# EAGLE board Android Wearable (EAGLE 5.11)
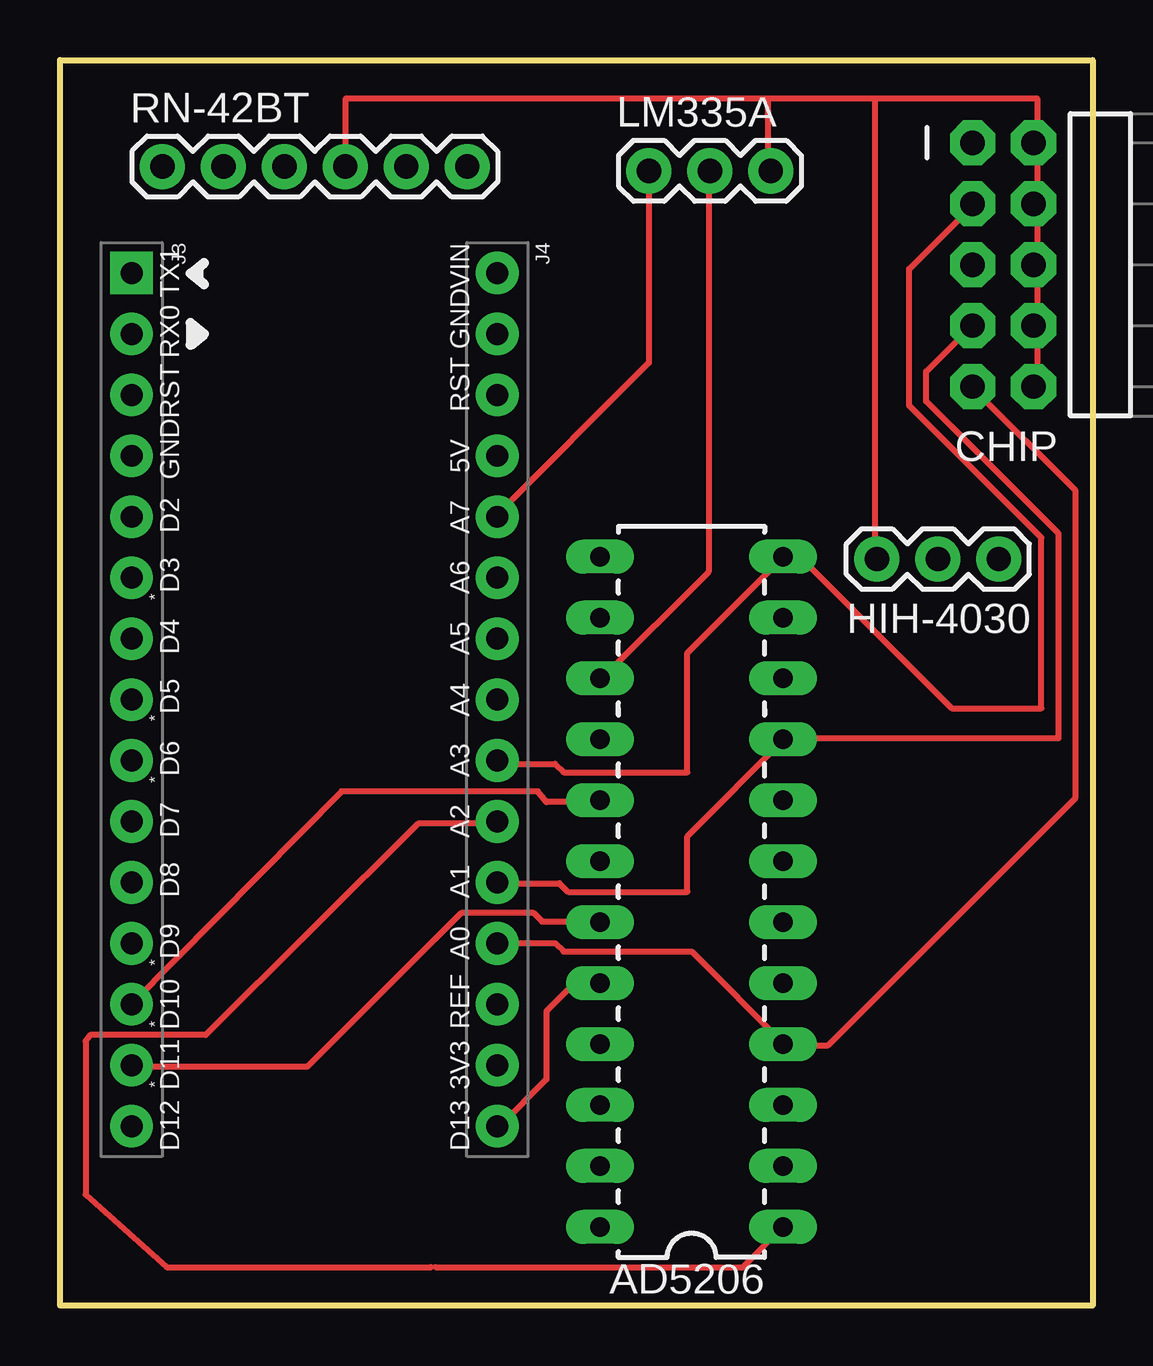
[diagram p0: board, top side]
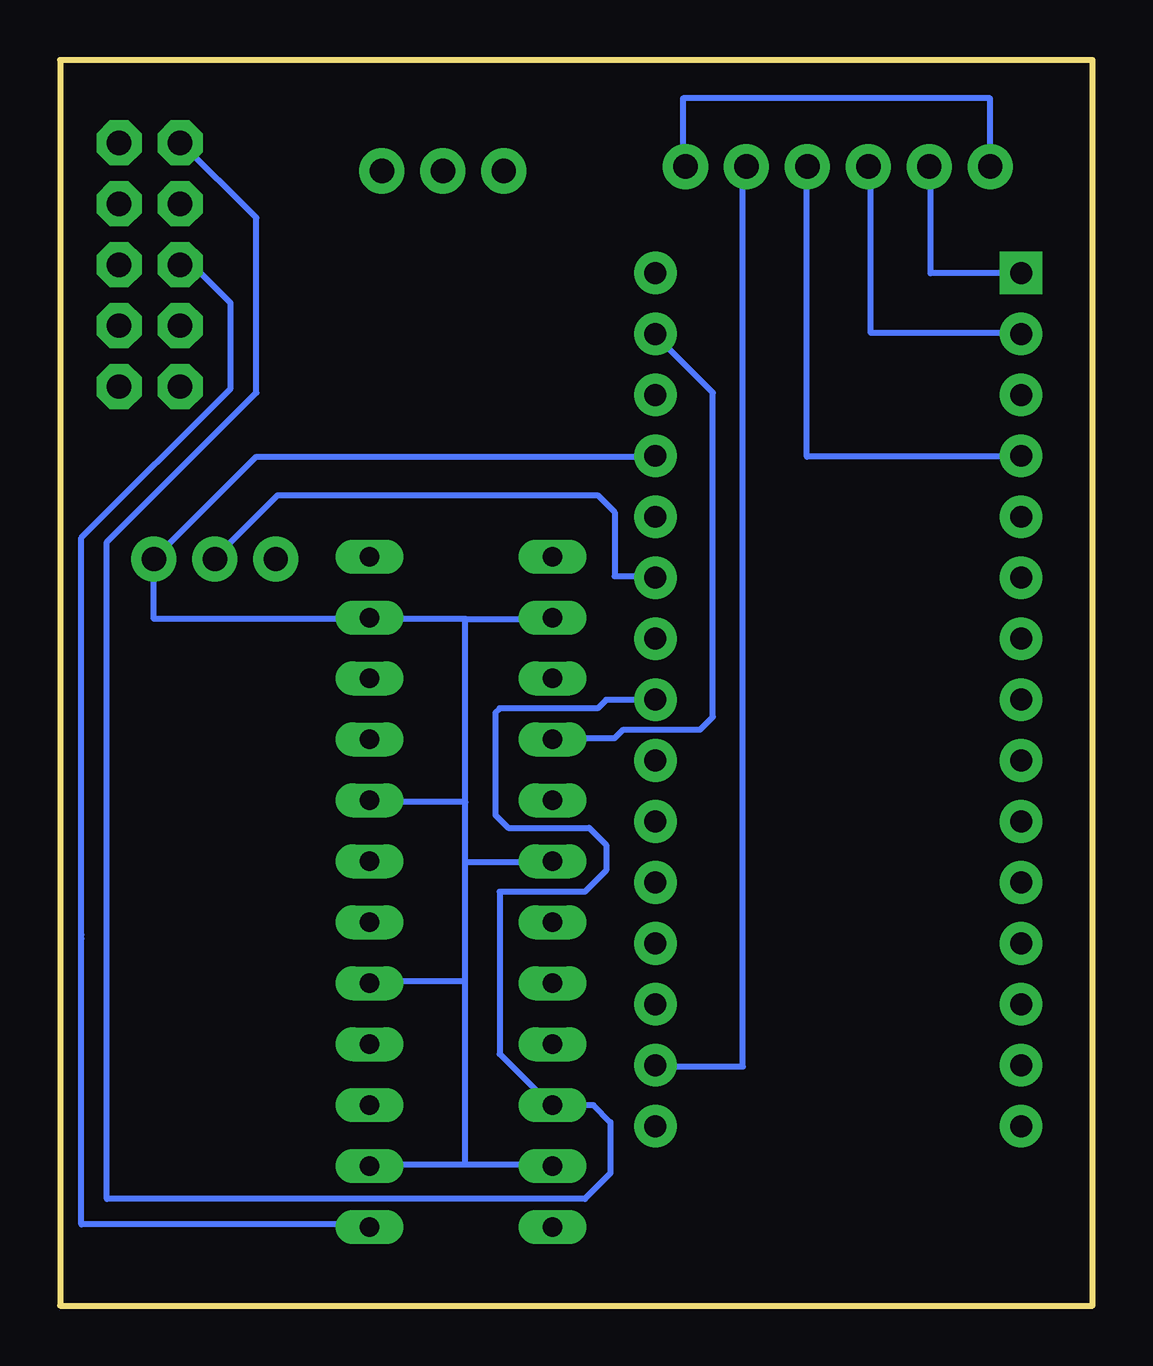
[diagram p1: board, bottom side, seen from below]

Size 43.03 x 51.92 mm. Coordinates in mm from the lower left corner, seen from the top.
Outline: 0,51.92 43.03,51.92 43.03,0 0,0 0,51.92
Copper layers (1*16): Top 0.035mm / dielectric 1.5mm / Bottom 0.035mm
Design rules "default *": minimum track width 8mil, minimum drill 16mil, track to track 8mil, track to pad 8mil, pad to pad 8mil, via to via 8mil, smd to smd 8mil, copper to edge 8mil, drill to drill 8mil, minimum pad ring 12mil, minimum via ring 8mil, stop-mask expansion 4mil, vias tented up to drill 18mil, thermal gap 10mil

## Footprints (pad centres in the part's own frame; a part is rotated, then mirrored left to right if it is on the bottom)
DIL24 = drill 0.813 long: 1 -13.97,-3.81; 2 -11.43,-3.81; 3 -8.89,-3.81; 4 -6.35,-3.81; 5 -3.81,-3.81; 6 -1.27,-3.81; 7 1.27,-3.81; 8 3.81,-3.81; 9 6.35,-3.81; 10 8.89,-3.81; 11 11.43,-3.81; 12 13.97,-3.81; 13 13.97,3.81; 14 11.43,3.81; 15 8.89,3.81; 16 6.35,3.81; 17 3.81,3.81; 18 1.27,3.81; 19 -1.27,3.81; 20 -3.81,3.81; 21 -6.35,3.81; 22 -8.89,3.81; 23 -11.43,3.81; 24 -13.97,3.81
2X5-RA = drill 1.016 pad 1.88 octagon: 1 -1.27,5.08; 2 1.27,5.08; 3 -1.27,2.54; 4 1.27,2.54; 5 -1.27,0; 6 1.27,0; 7 -1.27,-2.54; 8 1.27,-2.54; 9 -1.27,-5.08; 10 1.27,-5.08
1X03 = drill 1.016 pad 1.88 round: 1 0,0; 2 2.54,0; 3 5.08,0
HEAD15-NOSS = drill 0.914 pad 1.778 square: 1 0,0 | drill 0.914 pad 1.778 round: 2 2.54,0; 3 5.08,0; 4 7.62,0; 5 10.16,0; 6 12.7,0; 7 15.24,0; 8 17.78,0; 9 20.32,0; 10 22.86,0; 11 25.4,0; 12 27.94,0; 13 30.48,0; 14 33.02,0; 15 35.56,0
HEAD15-NOSS-1 = drill 0.914 pad 1.778 round: 1 0,0; 2 2.54,0; 3 5.08,0; 4 7.62,0; 5 10.16,0; 6 12.7,0; 7 15.24,0; 8 17.78,0; 9 20.32,0; 10 22.86,0; 11 25.4,0; 12 27.94,0; 13 30.48,0; 14 33.02,0; 15 35.56,0
1X06 = drill 1.016 pad 1.88 round: 1 0,0; 2 2.54,0; 3 5.08,0; 4 7.62,0; 5 10.16,0; 6 12.7,0

## Placement (x,y rotation side)
AD5206  [DIL24]  26.31,17.25 90 top
CHIP  [2X5-RA]  39.29,43.38 0 top
HIH-4030  [1X03]  39.12,31.11 180 top
J3  HEAD15-NOSS  [HEAD15-NOSS]  2.98,43.04 270 top
J4  HEAD15-NOSS-1  [HEAD15-NOSS-1]  18.22,43.04 270 top
LM335A  [1X03]  24.54,47.29 0 top
RN-42BT  [1X06]  4.27,47.47 0 top

## Library data of the parts
AD5206 CHIP HIH-4030 LM335A RN-42BT = SparkFun
J3 J4 = MyCON2

## Nets
S$1: RN-42BT.1
S$9: LM335A.1
S$12: HIH-4030.1

## Tracks (layer width: path | path; a pad name or v marks a point on that pad's centre or on a via)
S$1
  Bottom 0.254: RN-42BT.1 4.27,50.32 17.07,50.32 17.07,47.47
S$2
  Bottom 0.254: 6.76,47.47 6.76,43.03 2.84,43.03
S$3
  Bottom 0.254: 9.25,47.47 9.25,40.54 2.84,40.54
S$4
  Bottom 0.254: 11.91,47.47 11.91,35.38 3.02,35.38
S$5
  Bottom 0.254: 14.58,47.47 14.58,9.96 18.31,9.96
S$6
  Top 0.254: 18.31,20.09 14.93,20.09 6.07,11.28 1.27,11.28 1.07,11.02 1.07,4.62 4.45,1.6 15.47,1.6
S$8
  Top 0.254: 27.03,47.3 27.03,30.58 22.58,26.14
S$9
  Top 0.254: LM335A.1 24.54,39.29 18.14,32.89
S$10
  Top 0.254: 33.96,50.32 40.72,50.32 40.72,38.41 40.54,38.23 | 29.52,50.32 11.91,50.32 11.91,47.47 | 29.52,50.32 33.96,50.32 | 33.96,31.11 33.96,50.32 | 29.52,47.3 29.52,50.32
S$11
  Bottom 0.254: 36.63,31.11 33.96,33.78 20.62,33.78 19.91,33.07 19.91,30.4 18.31,30.4
S$12
  Bottom 0.254: 18.14,35.38 34.85,35.38 HIH-4030.1 39.12,28.63 26.14,28.63 | 26.14,28.63 22.58,28.63 | 26.14,20.98 30.05,20.98 | 26.14,20.98 26.14,28.63 | 26.14,18.49 22.58,18.49 | 26.14,18.49 26.14,20.98 | 26.14,5.87 30.23,5.87 | 26.14,5.87 26.14,18.49 | 22.4,5.87 26.14,5.87
S$13
  Top 0.254: 18.31,15.11 20.62,15.11 20.98,14.76 26.31,14.76 30.23,10.85 32,10.85 42.32,21.16 42.32,33.96 38.05,38.23
S$14
  Top 0.254: 18.14,17.6 20.8,17.6 21.16,17.25 26.14,17.25 26.14,19.56 30.23,23.65 41.61,23.65 41.61,32.18 36.09,37.69 36.09,38.94 38.05,40.89
S$15
  Top 0.254: 15.65,1.6 28.45,1.6 30.23,3.38
S$16
  Bottom 0.254: 38.05,43.38 37.52,43.38 35.92,41.78 35.92,38.23 42.14,32 42.14,15.47 42.14,15.29 42.14,3.38 30.23,3.38
S$17
  Top 0.254: 18.14,22.58 20.62,22.58 20.98,22.22 26.14,22.22 26.14,27.2 30.05,31.11 30.94,31.11 37.16,24.89 40.89,24.89 40.89,32 35.38,37.52 35.38,43.21 38.05,45.87
S$18
  Bottom 0.254: 22.58,23.65 19.91,23.65 19.56,24 16.36,24 15.82,24.54 15.82,38.05 18.14,40.36
S$19
  Bottom 0.254: 18.31,25.25 20.27,25.25 20.62,24.89 24.71,24.89 24.89,24.71 24.89,20.45 24.36,19.91 20.98,19.91 20.27,19.2 20.27,18.14 21.16,17.25 24.71,17.25 24.71,10.49 22.58,8.36 20.8,8.36 20.09,7.65 20.09,5.51 21.16,4.45 41.07,4.45 41.07,31.83 34.85,38.05 34.85,45.34 38.05,48.54
S$20
  Top 0.254: 22.58,20.98 20.27,20.98 19.91,21.44 11.73,21.44 3.02,12.62
S$22
  Top 0.254: 22.58,13.51 21.51,13.51 20.27,12.27 20.27,9.42 18.31,7.47
S$23
  Bottom 0.254: 26.31,13.51 30.05,13.51
S$24
  Top 0.254: 22.58,16 20.09,16 19.74,16.36 16.71,16.36 10.31,9.96 2.84,9.96

## Text on the board
tPlace: TX1 | VIN | RX0 | GND | RST | RST | GND | 5V | D2 | A7 | * | D3 | A6 | D4 | A5 | D5 | A4 | * | * | D6 | A3 | D7 | A2 | D8 | A1 | D9 | A0 | * | * | D10 | REF | * | D11 | 3V3 | D12 | D13